# Altium PCB Mini-Rambo-ATX.PcbDoc (part 2 of 3)
Units mil, origin at the board's own origin, x right, y up, seen from the top; angles counter-clockwise.
Board outline 4133.86 x 2795.28 mil, 4 copper layers (Top, GND, Supply, Bottom), stack 61.811 mil thick; 252 components, 203 nets, 844 pads, 559 vias.
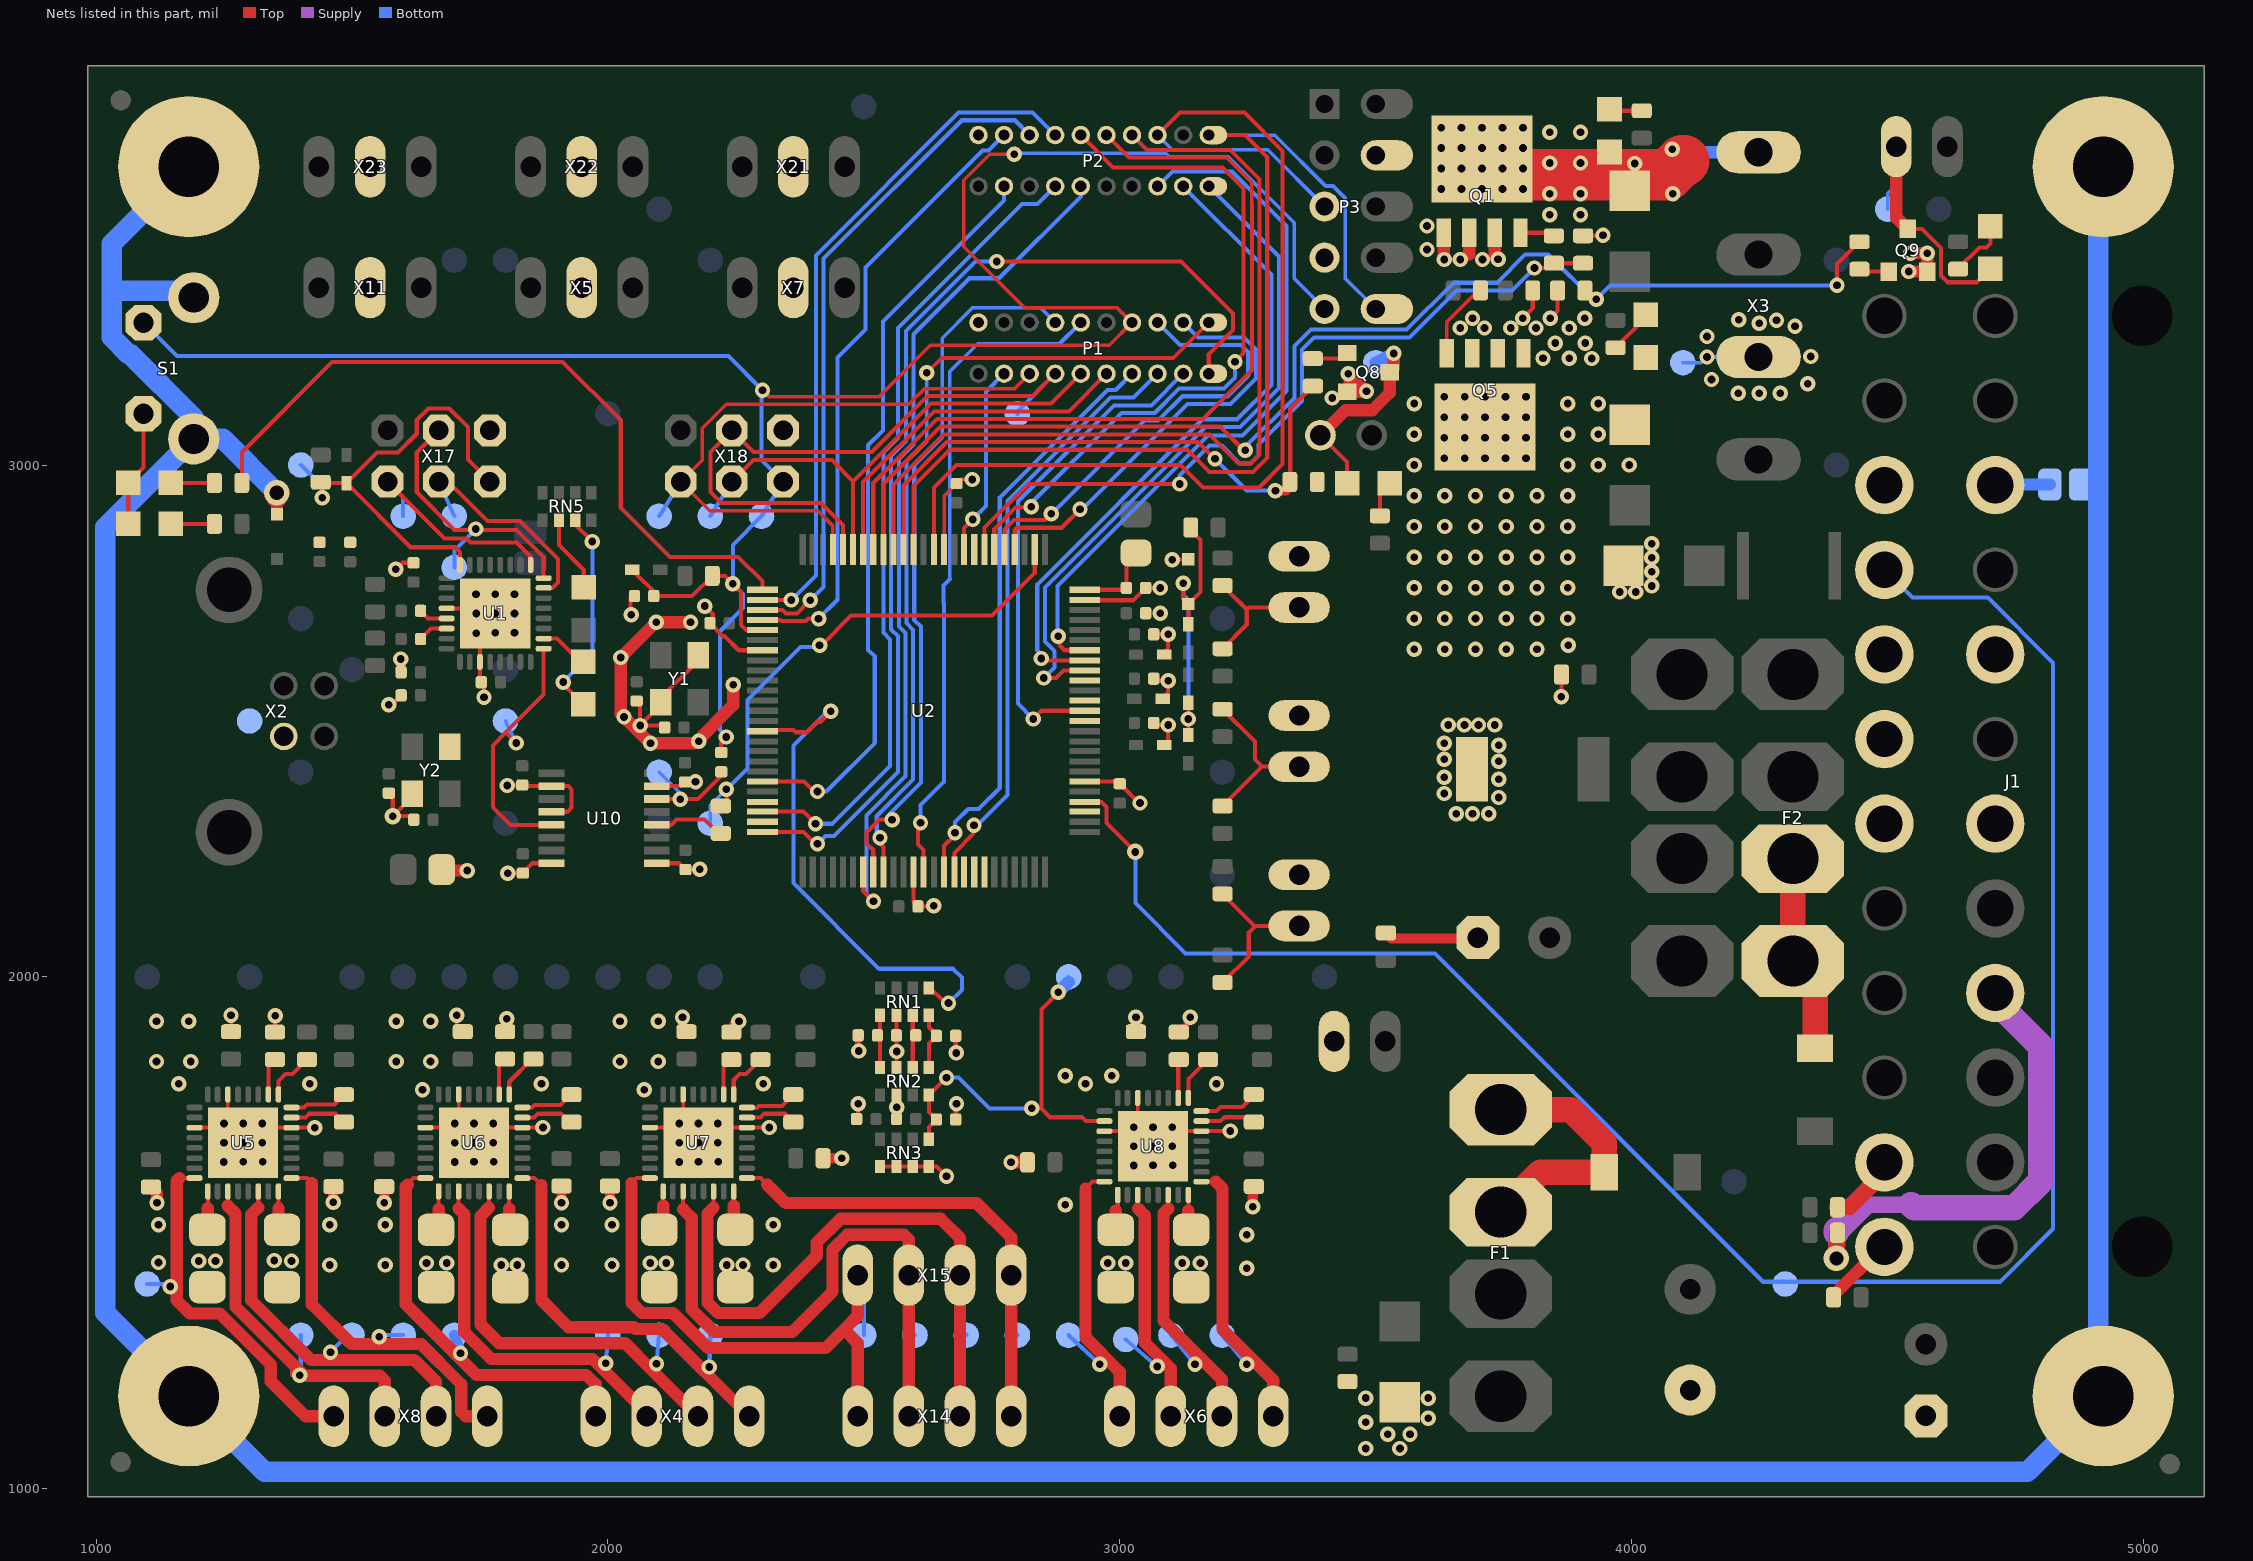
[diagram p4: the nets of this part, all layers, seen from the top]

## Via types
v1: diameter 30, hole 15, Top to Bottom, 422 vias
v2: diameter 30, hole 15, Top to Bottom, tented both sides, 131 vias
v3: diameter 50, hole 28, Top to Bottom, tented both sides, 3 vias
v4: diameter 32, hole 15, Top to Bottom, 1 vias
v5: diameter 30, hole 15, Top to Bottom, tented top, 1 vias
v6: diameter 32, hole 15, Top to Bottom, tented both sides, 1 vias

## Nets (pads, with @x,y where several pads share a name; then routed paths per layer and width w, separated by ;. In a path a pad name is that pad's centre, name@x,y a point inside that pad or via, vN(x,y) a via of type N, cw(c..) or ccw(c..) an arc to the next point about the centre after c; other vN are vias at no path point) (continued)
E1-STEP: P2.P$9 U2.57 | length 1688.2
  Top w8: U2.57@2498.68,2205 2498.68,2167.66 v1(2518.7,2147.64)
  Bottom w8: v1(2518.7,2147.64) 2504.92,2161.42 2504.92,2315.61 2581.33,2392.02 2581.33,2671.84 2568.38,2684.79 2568.38,3011.73 2597,3040.35 2597,3255.47 2706.33,3364.81 2763.78,3364.81 2923.82,3524.84 P2.P$9@2923.82,3544.49 P2.P$9@2921.7,3544.49
E-REF-PWM: RN1.1 U2.40 | length 1038.4
  Top w8: U2.40@2301.83,2480 2304.13,2482.3 2362.81,2482.3 2367.18,2477.93 2388.72,2477.93 2409.22,2498.44 2414.77,2498.44 v1(2435.04,2518.7) ; RN1.1@2626.97,1978.35 2629.65,1978.35 2659.18,1948.82 v1(2665.35,1948.82)
  Bottom w8: v1(2435.04,2518.7) 2429.49,2518.7 2362.41,2451.62 2362.41,2183.41 2530.02,2015.8 2674.51,2015.8 2691.35,1998.96 2691.35,1974.82 v1(2665.35,1948.82)
FAN-0: R21.1 R71.1 U2.17 | length 2438.1
  Top w8: U2.17@2538.05,2834.96 2538.05,2963.38 2649.52,3074.85 3196.15,3074.85 v1@3249,3022 ; v1(4401,3351) 4401,3392.33 R71.1@4444.89,3436.22
  Bottom w8: v1(3245,3029) 3245,3034.98 3341,3130.98 3341,3232.21 3373.26,3264.47 3560.09,3264.47 3651.62,3356 3737,3356 3792,3411 3837,3411 3924,3324 v2(3931,3324) 3958,3351 v1(4401,3351) ; v1@3246,3022 v1@3249,3022
FAN-1: R9.1 R16.1 U2.15 | length 1172.4
  Top w8: U2.15@2577.42,2834.96 2577.42,2960.32 2661.94,3044.85 3153.15,3044.85 v1(3186,3012) ; R16.1@3324,2950 3332.23,2958.23 R16.1@3332.23,2967 3332.98,2967.76 3332.98,3110.22 R9.1@3377,3154.23
  Top w20: v1(3304,2950) R16.1@3324,2950
  Bottom w8: v1(3186,3012) 3248,2950 v1(3304,2950)
FAN-2: P2.P$10 U2.6 | length 1392.2
  Top w8: U2.6@2754.79,2834.96 2754.79,2875.31 2796.34,2916.86 2825.32,2916.86 v1(2826.91,2918.45) ; P2.P$10@2923.82,3644.49 2987.09,3581.22 3200.78,3581.22 3242,3540 3242,3219 v2(3225,3202)
  Bottom w8: v1(2826.91,2918.45) 2820.02,2918.45 3003.19,3101.61 3068.3,3101.61 3116.03,3149.35 3203.83,3149.35 3225,3170.52 v2(3225,3202) v2@3219.59,3196.59
FGND: "Net Tie.1" D16.C pad.0 pad.1 pad.2 pad.3 S1.3 S1.4 | length 9358.2
  Top w24: D16.C@1353.35,2903.54 v3@1353.35,2935.65
  Top w40: v3@1353.35,2935.65 v3(1353.35,2945.61)
  Bottom w40: pad.2@1181.1,3582.68 1030.73,3432.31 1030.73,3338 ; S1.3@1190.73,3326.98 1177.73,3339.98 1032.71,3339.98 1030.73,3338 ; v3(1353.35,2945.61) 1247.98,3050.98 S1.4@1190.73,3050.98 ; pad.1@4921.26,3582.68 4911.58,3573 4911.58,1190.78 pad.0@4921.26,1181.1 4773.16,1033 1329.2,1033 pad.3@1181.1,1181.1 1018,1344.2 1018,2878.24 S1.4@1190.73,3050.98 ; 1030.73,3338 1030.73,3249.29 1064.05,3215.98 1067.42,3215.98 1190.73,3092.66 S1.4@1190.73,3050.98
GND: "Net Tie.2" C1.2 C3.2 C4.2 C5.2 C6.2 C7.2 C8.2 C9.2 C17.2 C18.2 C19.2 C20.2 C21.2 C22.2 C23.2 C24.2 C25.2 C26.2 C29.2 C31.1 C34.2 C36.1 C39.2 C41.1 C44.2 C46.1 C47.2 C48.2 C52.2 C53.2 C54.2 C56.2 C57.2 C58.2 C59.2 C60.2 C62.2 C68.1 C69.2 C71.2 C72.2 C73.2 C74.2 D2.A D5.A D7.A D8.A D12.A D13.A D15.A J1.3 J1.5 J1.7 J1.15 J1.17 J1.18 J1.19 J1.24 LED1.C LED7.C P1.P$2 P2.P$2 P3.4 P3.7 Q1.1 Q1.2 Q1.3 Q5.1 Q5.2 Q5.3 Q8.2 Q9.2 R4.2 R7.2 R8.2 R10.2 R14.2 R15.2 R16.2 R19.2 R20.2 R21.2 R43.2 R57.2 RN1.6 RN2.3 RN2.6 RN3.5 RN3.6 RN3.7 RN3.8 S1.2 U2.11 U2.32 U2.62 U2.81 U2.99 U5.6 U5.14 U5.19 U5.33 U6.6 U6.14 U6.19 U6.33 U7.6 U7.14 U7.19 U7.33 U8.6 U8.14 U8.19 U8.33 U10.9 U10.15 X1.1 X5.2 X7.2 X11.2 X12.1 X18.6 X21.2 X22.2 X23.2 X27.1 X28.1 Y1.2 Y1.4 | length 5508.4
  Top w7: U5.14@1257.4,1770.5 1257.4,1706.01 1257.87,1705.54 v2(1287.4,1676.01) ; C24.2@1263.78,1892.91 v1(1263.78,1925.2) ; v1(1704.72,1925.2) 1704.72,1904.72 C23.2@1716.54,1892.91 ; U6.14@1708.31,1770.5 1708.31,1706.01 1708.78,1705.54 v2(1738.31,1676.01) ; C18.2@2145.67,1900.79 C18.2@2153.54,1892.91 ; U7.14@2146.93,1770.5 2146.93,1706.01 2147.4,1705.54 v2(2176.93,1676.01) ; U2.11@2656.79,2834.96 2656.79,2939.57 C52.2@2681.1,2963.88 2689.66,2972.44 2712.6,2972.44 v1@2711.76,2971.6 ; U8.14@3034.96,1763.61 3034.96,1699.12 3035.43,1698.65 v2(3064.96,1669.12)
  Top w8: LED7.C@1063,2885 LED1.C@1063,2965 1092.73,2994.73 S1.2@1092.73,3099.98 ; U5.19@1192.4,1705.54 U5.33@1257.87,1705.54 ; v2(1287.4,1676.01) 1316.93,1705.54 U5.6@1381.89,1705.54 v1(1427.34,1705.54) ; C31.1@1349.42,1892.1 1349.42,1923.23 v1(1350.39,1924.21) ; U6.19@1643.31,1705.54 U6.33@1708.78,1705.54 ; v2(1738.31,1676.01) 1767.84,1705.54 U6.6@1832.8,1705.54 1872.86,1705.54 v1(1873.03,1705.71) ; C1.2@2044.09,2744.09 2044.09,2708.86 v1(2045.28,2707.68) ; C58.2@2056.1,2539.07 2062.99,2532.18 v1(2062.99,2491.14) ; U7.19@2081.93,1705.54 U7.33@2147.4,1705.54 ; U10.9@2095.13,2222.04 2139.18,2222.04 C68.1@2151.57,2209.65 ; U10.15@2095.13,2372.54 2095.59,2373 2142.98,2373 C69.2@2150.59,2380.61 2170.76,2380.61 v1(2171.16,2381) ; C57.2@2110.92,2487.2 2106.98,2491.14 v1(2062.99,2491.14) ; C68.1@2151.57,2209.65 2180.12,2209.65 v1(2179.43,2210.34) ; Y1.2@2176.56,2627.99 2176.56,2618.49 2103.15,2545.07 2103.15,2531.29 v1(2062.99,2491.14) ; v2(2176.93,1676.01) 2206.46,1705.54 U7.6@2271.42,1705.54 2314.79,1705.54 v1(2314.96,1705.71) ; v1(2188.98,2724.41) 2204.72,2708.66 2204.72,2696.17 C9.2@2199.5,2690.94 2225.09,2665.35 2227.69,2665.35 2228.02,2665.68 2255.59,2638.11 U2.32@2301.83,2638.11 ; C41.1@2241.14,1891.93 2241.14,1910.43 2255.9,1925.19 v1(2255.9,1913.38) ; v1@2488.19,1753.94 2488.87,1753.25 C48.2@2488.87,1722.44 ; RN3.5@2531.72,1629.5 RN3.6@2563.72,1629.5 RN3.7@2595.47,1629.5 RN3.8@2626.97,1629.5 2627.39,1629.92 2641.73,1629.92 v1(2661.42,1610.24) ; RN2.3@2563.72,1822.83 2563.72,1854.08 v1(2563.98,1854.33) 2563.68,1854.63 C21.2@2563.68,1885.83 ; RN1.6@2563.72,1924.77 C21.2@2563.72,1885.87 ; U2.62@2597.1,2205 2597.1,2146.31 C7.2@2605.61,2137.8 2635.83,2137.8 v1(2636.81,2138.78) ; C20.2@2679.43,1721.46 2679.43,1750.3 v1(2681.1,1751.97) ; C19.2@2679.43,1884.84 2679.43,1852.28 v1(2680.25,1851.47) ; U2.81@2931.79,2382 2995.27,2382 C8.2@3000,2377.27 3039.37,2337.9 3039.37,2334.65 v1@3045.39,2340.67 ; U2.99@2931.79,2736.54 2932.48,2735.84 3026.5,2735.84 C26.2@3050.5,2759.84 v1(3078.74,2759.84) ; U8.19@2969.96,1698.65 U8.33@3035.43,1698.65 ; v2(3064.96,1669.12) 3094.49,1698.65 U8.6@3159.45,1698.65 3215.38,1698.65 v1(3215.55,1698.82) ; C4.2@3066.24,2496.06 3070.19,2492.12 v1(3094.48,2492.12) 3094.48,2460.62 D5.A@3086.61,2452.76 ; C56.2@3066.24,2582.68 3070.19,2578.74 v1(3094.48,2578.74) 3094.48,2555.11 D15.A@3082.68,2543.31 ; C59.2@3066.24,2669.29 v1(3094.49,2669.29) 3094.49,2641.73 D13.A@3082.68,2629.92 ; v1(3102.36,2814.96) 3103.06,2815.65 D12.A@3133.86,2815.65 ; v1(3787,3287) 3806.77,3306.77 R57.2@3806.77,3341 ; v1(3841,3287) 3855.23,3301.23 R21.2@3855.23,3341 ; v1(3862.2,2547.24) 3862.99,2548.03 C62.2@3862.99,2590.55 ; R43.2@3905,3447.77 3942.77,3447.77 v1(3944,3449) ; C21.2@2563.68,1885.83 C21.2@2563.72,1885.87
  Top w12: C47.2@2488.87,1885.83 2488.87,1856.6 v1(2490.16,1855.32) ; C46.1@3115.16,1892.1 3137.8,1914.74 v1(3137.8,1921.26)
  Top w20: C71.2@1103.39,1585.63 C71.2@1107.24,1589.49 ; v1(1463.58,1560.04) C29.2@1463.58,1590.35 ; v1(1562.99,1559.06) C72.2@1562.99,1590.35 ; v1(1909.45,1559.06) C34.2@1909.45,1591.34 ; v1(2003.94,1559.06) C73.2@2003.94,1591.34 ; C18.2@2145.67,1900.79 v1(2145.67,1921.26) ; C39.2@2420.47,1645.67 v1(2456.69,1645.67) ; v1(3259.84,1551.18) 3259.84,1588.39 C44.2@3261.81,1590.35 ; C25.2@3519.68,2085.83 3530.71,2074.8 C54.2@3693.78,2074.8
  Top w24: C71.2@1107.24,1589.49 1119.09,1577.64 v1@1119.09,1558.07 ; v1(2062.99,2491.14) 2048.23,2491.14 v1@2039.37,2500 ; v1@2165.35,2692.91 v1(2094.2,2692.91) v1(2025.1,2623.82) 2025.1,2514.27 v1@2039.37,2500 ; v1(2244.65,2570.87) 2244.65,2530.94 2169.92,2456.2 v1(2083.17,2456.2) v1@2039.37,2500 ; v1(2787.4,1637.8) C74.2@2819.68,1637.8 ; C17.2@3031.5,1892.91 v1(3031.5,1921.26) ; Q8.2@3443.98,3143.32 v1@3481,3143.32 ; Q8.2@3449,3142.94 3449,3177 v1(3482,3144) ; v1@3632.68,3410.63 Q1.1@3632.68,3453.74 ; 3682.68,3411.81 Q1.2@3682.68,3453.74 ; v1@3732.68,3409.84 Q1.3@3732.68,3453.74 ; C60.2@4394.49,1374.02 4394.49,1378.18 4488.75,1472.44 J1.24@4493.7,1472.44 ; v1(4541.34,3377.95) Q9.2@4577.37,3377.95 v1(4577.37,3413.98) v1(4544.68,3413.98)
  Bottom w24: J1.3@4710.24,2960.63 4711.61,2962 4817,2962
  other v1: 3480.32,1078.74 3547.24,1078.74 3523.62,1106.3 3566.93,1106.3 3480.32,1129.92 3602.36,1137.8 3480.32,1177.17 3602.36,1177.17 3248,1431 1456.69,1437.01 1564.96,1437.01 1791.34,1437.01 1822.83,1437.01 1909.45,1437.01 2007.87,1437.01 2232.28,1437.01 2263.78,1437.01 2322.83,1437.01 1645.67,1440.94 1685.04,1440.94 2082.68,1440.94 2114.17,1440.94 2976.38,1440.94 3011.81,1440.94 3122.05,1440.94 3157.48,1440.94 1122,1442 1200.79,1444.88 1233.27,1444.88 1381.89,1444.88 1348.43,1445.87 3248.03,1496.06 1122.05,1515.75 1456.69,1515.75 1564.96,1515.75 1909.45,1515.75 2007.87,1515.75 2322.83,1515.75 2893.7,1555.12 1119.09,1559.06 2563.98,1745.08 2489.17,1751.97 1637.8,1779.53 2070.87,1779.53 1161.42,1791.34 1417.32,1791.34 1870.08,1791.34 2303.15,1791.34 2933.07,1791.34 3188.98,1791.34 1802.25,1918.4 3657.48,2318.9 3688.98,2318.9 3720.47,2318.9 3039.37,2339.57 3740.16,2350.39 3633.86,2358.27 3740.16,2385.83 3633.86,2389.76 3740.16,2421.26 3633.86,2425.2 3740.16,2452.76 3633.86,2456.69 2177.17,2460.63 3641.73,2492.13 3673.23,2492.13 3700.79,2492.13 3732.28,2492.13 2031.5,2507.87 2161.42,2692.91 3078.74,2710.63 3976.38,2751.97 4007.87,2751.97 4039.37,2763.78 4039.37,2791.34 4039.37,2818.9 4039.37,2846.46 2711.75,2971.6 3922,3208 3826.77,3208.66 3877.95,3208.66 3850.39,3238.19 3909.45,3238.19 3665.35,3267.72 3712.6,3267.72 3763.78,3267.72 3813,3267.72 3877.95,3267.72 3688.97,3287 3908,3287 3633.86,3401.57 3665.35,3401.57 3708.66,3401.57 3739,3402 3600,3421 3600,3467
  other v2: 3027.2,1631.43 3064.96,1631.91 3103.35,1631.72 1249.64,1638.32 1700.55,1638.32 2139.17,1638.32 1287.4,1638.8 1325.79,1638.61 1738.31,1638.8 1776.69,1638.61 2176.93,1638.8 2215.31,1638.61 3027.56,1669.12 3102.36,1669.12 1250,1676.01 1324.8,1676.01 1700.91,1676.01 1775.71,1676.01 2139.53,1676.01 2214.33,1676.01 3027.56,1706.52 3064.96,1706.52 3102.36,1706.52 1250,1713.41 1287.4,1713.41 1324.8,1713.41 1700.91,1713.41 1738.31,1713.41 1775.71,1713.41 2139.53,1713.41 2176.93,1713.41 2214.33,1713.41 2893.7,1807.09 2984.25,1807.09 1118.11,1834.65 1185.04,1834.65 1586.61,1834.65 1653.54,1834.65 2023.62,1834.65 2098.43,1834.65 1118.11,1913.39 1181.1,1913.39 1586.61,1913.39 1653.54,1913.39 2023.62,1913.39 2098.43,1913.39 3415,3131 3446,3178
GND1: C2.1 C11.2 C12.2 C13.2 C14.2 C15.2 C16.2 C63.2 C67.1 C70.2 R72.1 TP47.TP U1.3 U1.28 U1.33 U10.2 U10.4 U10.8 X2.4 X17.6 Y2.2 Y2.4 | length 887.1
  Top w8: C13.2@1571.85,2358.95 1579.72,2351.08 v4(1579.72,2313.98) ; v1(1571.85,2531.5) 1577.5,2531.5 C11.2@1596,2550 ; v1(1585.63,2796.26) 1598.37,2809 C16.2@1620,2809 ; C15.2@1595.47,2595.53 C15.2@1596,2595 ; C12.2@1613.61,2307.09 C12.2@1620.76,2307.09 1613.87,2313.98 v4(1579.72,2313.98) ; Y2.2@1617.54,2358.12 1617.54,2351.79 v4(1579.72,2313.98) ; C2.1@1675.2,2209.65 C2.1@1677.17,2207.68 ; U1.28@1685,2720 1770,2720 v2(1780,2710) 1750,2680 U1.3@1750,2615.51 1750,2578.44 C14.2@1752.65,2575.79 1757.87,2570.57 v1(1757.87,2546.26) ; v1(1803.15,2374.02) 1803.83,2374.7 C70.2@1832.68,2374.7 ; v1(1804.13,2202.76) C67.1@1833.66,2202.76 1852.94,2222.04 U10.8@1889.76,2222.04 ; C70.2@1833.36,2371.06 1834.84,2372.54 U10.2@1889.76,2372.54 1922.74,2372.54 1929.13,2366.14 1929.13,2330.71 1920.96,2322.54 U10.4@1889.76,2322.54
  Top w20: C15.2@1595.47,2595.53 v1(1595.47,2621.06)
  Top w24: C2.1@1677.17,2207.68 v1(1725.39,2207.68)
  other v2: 1742.6,2671.61 1780,2672.6 1817.4,2672.6 1742.8,2710 1817.4,2710 1780,2747.4 1817.4,2747.4 1742.31,2747.76
HEAT-0: R42.1 R43.1 U2.7 | length 1536.5
  Top w8: U2.7@2735.79,2834.96 2735.79,2877.52 2821.27,2963 v1(3117,2963) ; v1(3810,3385) 3838.77,3385 R42.1@3848,3394.23 R43.1@3905,3394.23
  Bottom w8: v1(3117,2963) 3117,2979.77 3175.23,3038 3199.23,3038 3234.23,3003 3255.77,3003 3271,3018.23 3271,3039.77 3356,3124.77 3356,3226 3379.47,3249.47 3566.31,3249.47 3657.83,3341 3766,3341 v1(3810,3385)
HEAT-1: P2.P$14 U2.16 | length 1736.2
  Top w7: 3215.5,3615.49 3272.98,3558 3272.98,3491
  Top w8: U2.16@2557.73,2834.96 2557.73,2961.85 2655.73,3059.85 3174.92,3059.85 3231.77,3003 3255.77,3003 3272.98,3020.21 3272.98,3491 ; P2.P$14@3023.82,3644.49 3052.82,3615.49 3215.5,3615.49
L13: R33.1 U2.26 | length 1444.6
  Top w8: R33.1@1284.77,2965 1284.77,3024.93 1461.38,3201.54 1911.11,3201.54 2025.13,3087.52 2025.13,2916.44 2121,2820.56 2254.24,2820.56 2301.83,2772.98 U2.26@2301.83,2756.22
MISO2: TP43.TP U1.17 X17.1 | length 436.5
  Top w8: X17.1@1569.53,2967.56 1680.76,2856.32 1723.91,2856.32 1731.23,2849 1821.37,2849 1848.9,2821.47 U1.17@1848.9,2805
  Bottom w8: X17.1@1569.53,2967.56 1600,2937.09 TP43.TP@1600,2900
MOSI2: TP42.TP U1.16 X17.4 | length 572.2
  Top w8: X17.4@1669.53,3067.56 1626.53,3024.56 1626.53,2947.09 1700.29,2873.32 1821.09,2873.32 1874.49,2819.92 U1.16@1874.49,2779
  Bottom w8: TP42.TP@1700,2800 1700,2833 v2(1742,2875)
NetC10_1: C10.1 TP29.TP U10.14 | length 230.2
  Top w8: U10.14@2095.13,2347.54 2175.88,2347.54 2225.39,2397.05 C10.1@2225.39,2406.5
  Bottom w7: TP29.TP@2100,2400 2141,2359 v2(2141,2347)
NetC19_1: C19.1 RN1.8 RN2.1 | length 115
  Top w8: RN2.1@2626.97,1822.83 2626.97,1870.08 2642.72,1885.83 2626.97,1901.58 RN1.8@2626.97,1924.77
NetC20_1: C20.1 RN2.8 RN3.1 TP12.TP U8.18 | length 770.3
  Top w8: RN3.1@2626.97,1683.07 2626.97,1706.69 C20.1@2641.73,1721.46 2626.97,1736.22 RN2.8@2626.97,1769.26 2627.53,1769.26 v1(2661.42,1803.15) ; 2845.83,1744 2864.02,1725.82 2926.54,1725.82 2934.03,1718.33 U8.18@2969.96,1718.33 ; 2846.72,1743.11 2846.72,1936.72 v2(2880,1970)
  Top w10: v1(2827.76,1743.11) 2828.65,1744 2845.83,1744
  Bottom w8: v1(2661.42,1803.15) 2685.04,1803.15 2745.08,1743.11 v1(2827.76,1743.11) ; TP12.TP@2900,1990 TP12.TP@2900,2000
  Bottom w24: v2(2880,1970) TP12.TP@2900,1990
NetC21_1: C21.1 RN1.7 RN2.2 | length 106.8
  Top w8: RN2.2@2595.47,1822.83 2595.47,1879.92 C21.1@2601.38,1885.83 2595.47,1891.73 RN1.7@2595.47,1924.77
NetC26_1: C26.1 L2.2 U2.100 | length 166.7
  Top w8: U2.100@2931.79,2756.22 3009.17,2756.22 C26.1@3012.8,2759.84 3012.8,2838.97 L2.2@3009.24,2842.52
NetC27_2: C27.2 U5.9 | length 99
  Top w8: U5.9@1356.3,1770.5 1356.3,1796.26 1370.08,1810.04 1383.54,1810.04 C27.2@1412.06,1838.55
NetC28_1: C28.1 U5.7 | length 112.1
  Top w8: U5.7@1381.89,1725.22 1408.84,1725.22 1416.15,1732.54 1468.05,1732.54 C28.1@1484.25,1716.34
NetC28_2: C28.2 U5.8 | length 112.7
  Top w8: U5.8@1381.89,1744.91 1406.32,1744.91 1412.4,1750.98 1465.35,1750.98 C28.2@1484.25,1769.88
NetC31_2: C31.2 U5.10 | length 73.4
  Top w8: U5.10@1336.61,1770.5 1336.61,1825.75 C31.2@1349.42,1838.55
NetC32_2: C32.2 U6.9 | length 94
  Top w8: U6.9@1807.21,1770.5 1807.21,1795.16 1851.42,1839.37 C32.2@1858.27,1839.37
NetC33_1: C33.1 U6.7 | length 106.2
  Top w8: U6.7@1832.8,1725.22 1855.77,1725.22 1863.26,1732.71 1908.29,1732.71 1924.66,1716.34 C33.1@1929.13,1716.34
NetC33_2: C33.2 U6.8 | length 106.7
  Top w8: U6.8@1832.8,1744.91 1851.21,1744.91 1856.3,1750 1907,1750 1926.88,1769.88 C33.2@1929.13,1769.88
NetC36_2: C36.2 U6.10 | length 70.7
  Top w8: U6.10@1787.52,1770.5 C36.2@1787.52,1832.1 ; C36.2@1795.39,1832.1 C36.2@1801.85,1838.55
NetC37_2: C37.2 U7.9 | length 97.2
  Top w8: U7.9@2245.83,1770.5 2245.83,1798.98 2256.89,1810.04 2269.88,1810.04 C37.2@2298.23,1838.39
NetC38_1: C38.1 U7.7 | length 100.7
  Top w8: U7.7@2271.42,1725.22 2297.7,1725.22 2305.19,1732.71 2345.83,1732.71 C38.1@2362.2,1716.34
NetC38_2: C38.2 U7.8 | length 101.8
  Top w8: U7.8@2271.42,1744.91 2272.23,1744.09 2290.77,1744.09 2294.71,1748.03 2340.35,1748.03 C38.2@2362.2,1769.88
NetC41_2: C41.2 U7.10 | length 74.1
  Top w8: U7.10@2226.14,1770.5 2226.14,1823.39 C41.2@2241.14,1838.39
NetC42_2: C42.2 U8.9 | length 90.8
  Top w8: U8.9@3133.86,1763.61 3133.86,1800.17 C42.2@3172.24,1838.55
NetC43_1: C43.1 U8.7 | length 109.4
  Top w8: U8.7@3159.45,1718.33 3196.88,1718.33 3204.37,1725.82 3252.33,1725.82 C43.1@3261.81,1716.34
NetC43_2: C43.2 U8.8 | length 116.3
  Top w8: U8.8@3159.45,1738.02 3188.8,1738.02 3196.85,1746.06 3239.17,1746.06 3261.81,1768.7 C43.2@3261.81,1769.88
NetC46_2: C46.2 U8.10 | length 75.4
  Top w8: U8.10@3114.17,1763.61 3114.17,1837.57 C46.2@3115.16,1838.55
NetC47_1: C47.1 RN1.5 RN2.4 | length 106.2
  Top w8: RN2.4@2531.72,1822.83 2531.72,1880.68 C47.1@2526.57,1885.83 2531.72,1890.98 RN1.5@2531.72,1924.77
NetD6_A: D6.A LED2.C Q1.MB TP17.TP X3.4 | length 553.8
  Top w50: X3.4@4246.26,3594.49 X3.4@4248.03,3596.26
  Top w100: Q1.MB@3716.45,3567.01 4070.95,3567.01 4098.43,3594.49 4102.36,3594.49
  Bottom w8: X3.4@4248.03,3611.02 X3.4@4249.01,3612
  Bottom w24: TP17.TP@4100,3600 4111.02,3611.02 X3.4@4248.03,3611.02
  other v1: 3840,3489 3900,3489 3840,3530 3900,3530 4080,3530 3627.68,3539.13 3667.68,3539.13 3707.68,3539.13 3747.68,3539.13 3787.68,3539.13 3627.68,3579.13 3667.68,3579.13 3707.68,3579.13 3747.68,3579.13 3787.68,3579.13 3840,3590 3900,3590 3627.68,3619.13 3667.68,3619.13 3707.68,3619.13 3747.68,3619.13 3787.68,3619.13 3840,3650 3900,3650 3627.68,3659.13 3667.68,3659.13 3707.68,3659.13 3747.68,3659.13 3787.68,3659.13
  other v2: 4006,3589 4079,3617
NetD10_A: D10.A LED6.C Q5.MB TP18.TP X3.2 | length 152.6
  Bottom w7: TP18.TP@4100,3200 4136,3200 v2(4147.02,3211.02) X3.2@4248.03,3211.02
  other v1: 3575,2640 3635,2640 3695,2640 3755,2640 3815,2640 3876,2648 3575,2700 3635,2700 3695,2700 3755,2700 3815,2700 3875,2700 3575,2760 3635,2760 3695,2760 3755,2760 3815,2760 3875,2760 3575,2820 3635,2820 3695,2820 3755,2820 3815,2820 3875,2820 3575,2880 3635,2880 3695,2880 3755,2880 3815,2880 3875,2880 3575,2940 3635,2940 3695,2940 3755,2940 3815,2940 3875,2940 3575,3000 3875,3000 3935,3000 3995,3000 3633.58,3013.11 3673.58,3013.11 3713.58,3013.11 3753.58,3013.11 3793.58,3013.11 3633.58,3053.11 3673.58,3053.11 3713.58,3053.11 3753.58,3053.11 3793.58,3053.11 3575,3060 3875,3060 3935,3060 3633.58,3093.11 3673.58,3093.11 3713.58,3093.11 3753.58,3093.11 3793.58,3093.11 3575,3120 3875,3120 3935,3120 3633.58,3133.11 3673.58,3133.11 3713.58,3133.11 3753.58,3133.11 3793.58,3133.11
  other v2: 4208,3140 4249,3140 4290,3140 4344,3159 4156,3167 4350,3212 4147,3251 4319,3271 4249,3277 4283,3283 4209,3284
NetF1_1: F1.1 FB1.2 | length 521.2
  Top w50: F1.1@3744.09,1540.63 3821.57,1618.11 FB1.2@3946.46,1618.11 3946.46,1675.59 3881.42,1740.63 F1.1@3744.09,1740.63
NetF2_1: F2.1 FB2.2 | length 388.3
  Top w50: F2.1@4314.96,2231.02 F2.1@4314.96,2031.02 4358.27,1987.72 FB2.2@4358.27,1860.63
NetJ1_9: J1.9 R74.2 | length 954.4
  Top w32: v3(4400,1450) 4400,1475 4401.77,1476.77 R74.2@4401.77,1500
  Supply w32: v3(4400,1450) 4400,1500 ; 4450.39,1555.12 4544.88,1555.12
  Supply w50: 4400,1500 4400,1504.73 4450.39,1555.12 ; 4544.88,1555.12 4545.74,1555.12 4552.15,1548.71 4747.14,1548.71 4799.32,1600.89 4799.32,1864.37 4710.24,1953.46 J1.9@4710.24,1968.5
NetJ1_23: J1.23 R75.1 | length 139.5
  Top w32: R75.1@4401.77,1550 4425,1550 4493.7,1618.7 J1.23@4493.7,1637.8
NetLED1_A: LED1.A R33.2 | length 84.9
  Top w8: LED1.A@1146.34,2965 R33.2@1231.23,2965
NetLED2_A: LED2.A R40.1 | length 64.1
  Top w8: LED2.A@3956.69,3694.88 3959.45,3692.12 R40.1@4019.69,3692.12
NetLED3_A: LED3.A R70.1 | length 118
  Top w8: R70.1@4637.79,3382.68 4637.79,3383.76 4679.23,3425.2 4692.91,3425.2 4700.79,3433.07 LED3.A@4700.79,3466.53
NetLED3_C: LED3.C Q9.3 TP23.TP X9.1 | length 546.2
  Top w8: Q9.3@4539.37,3461.32 4566.8,3461.32 4604.37,3423.75 4604.37,3369.71 4616.96,3357.11 4674.7,3357.11 LED3.C@4700.79,3383.2
  Top w25: X9.1@4516.93,3622.05 4516.93,3483.76 Q9.3@4539.37,3461.32
  Bottom w7: TP23.TP@4500,3500 4500,3531 4517,3548 4517,3621.98 X9.1@4516.93,3622.05
NetLED4_A: LED4.A RN5.6 | length 151.5
  Top w8: RN5.6@1904.28,2892.29 1904.28,2843.76 1952.76,2795.28 LED4.A@1952.76,2760.83
NetLED6_A: LED6.A R58.1 | length 88.6
  Top w8: R58.1@3968.5,3229.14 4027.56,3288.2 LED6.A@4027.56,3293.31
NetLED7_A: LED7.A R35.2 | length 84.9
  Top w8: LED7.A@1146.34,2885 R35.2@1231.23,2885
NetLED8_A: LED8.A R69.1 | length 71.2
  Top w8: R69.1@3508,2900.77 3508,2944.67 LED8.A@3527.34,2964
NetLED8_C: LED8.C Q8.3 TP22.TP X35.2 | length 404.6
  Top w8: X35.2@3392,3058 3444,3006 LED8.C@3444,2964
  Top w24: X35.2@3392,3058 3441,3107 3493.08,3107 3527.35,3141.27 Q8.3@3527.35,3181.32 3535,3188.97 v2(3535,3218)
  Bottom w24: TP22.TP@3500,3200 v2(3535,3218)
NetLED10_A: LED10.A RN5.7 | length 415.3
  Top w8: v1(1912.49,2575.91) 1910.43,2573.82 LED10.A@1951.77,2532.48 ; RN5.7@1936.02,2892.29 1936.02,2883.82 v1@1969.45,2850.39
  Bottom w8: v1(1912.49,2575.91) 1969.49,2632.91 v1(1969.49,2850.39)
NetQ1_4: Q1.4 R42.2 | length 70.7
  Top w8: Q1.4@3783.66,3452.75 Q1.4@3782.68,3453.74 3835.03,3453.74 R42.2@3847,3441.77
NetQ5_4: Q5.4 R56.2 | length 148.6
  Top w7: Q5.4@3638.58,3218.5 3638.58,3279.43 3700.15,3341 R56.2@3700.77,3341
NetQ8_1: Q8.1 R9.2 | length 69.3
  Top w8: R9.2@3377,3207.77 3438.31,3207.77 Q8.1@3443.98,3213.45
NetQ9_1: Q9.1 R71.2 | length 59
  Top w8: R71.2@4444.89,3382.67 4449.61,3377.95 Q9.1@4501.97,3377.95
NetR4_1: R4.1 U5.32 | length 78.1
  Top w8: 1356.3,1548.23 U5.32@1356.3,1581.01
  Top w24: 1356.3,1548.23 1356.3,1512.68 R4.1@1363.19,1505.79
NetR5_1: R5.1 R6.2 X12.2 | length 314.7
  Top w8: R6.2@3200.78,1988.97 3251.97,2040.16 3251.97,2086.61 3264.96,2099.61 ; R5.1@3200.78,2162.21 3263.39,2099.61 3264.96,2099.61 ; X12.2@3352.36,2099.61 3264.96,2099.61
NetR7_1: R7.1 U5.25 | length 76.6
  Top w8: 1218.4,1548.13 U5.25@1218.4,1581.01
  Top w24: R7.1@1217.52,1504.8 1218.4,1505.68 1218.4,1548.13
NetR8_1: R8.1 U6.32 | length 76.1
  Top w8: 1807.09,1547.24 1807.09,1580.89 U6.32@1807.21,1581.01
  Top w24: 1807.09,1547.24 1807.09,1507.76 R8.1@1809.06,1505.79
NetR10_1: R10.1 U6.25 | length 73.3
  Top w8: 1669.29,1546.26 U6.25@1669.31,1577.07
  Top w24: R10.1@1664.37,1505.79 1669.31,1510.72 1669.29,1546.26
NetR14_1: R14.1 U7.32 | length 76.5
  Top w8: 2245.83,1552.91 U7.32@2245.83,1581.01
  Top w24: 2245.83,1552.91 2245.83,1508.98 R14.1@2249.02,1505.79
NetR15_1: R15.1 U7.25 | length 78.3
  Top w8: 2107.93,1552.81 U7.25@2107.93,1581.01
  Top w24: R15.1@2100.39,1505.79 2107.93,1513.32 2107.93,1552.81
NetR19_1: R19.1 U8.32 | length 70.8
  Top w8: 3133.86,1543.31 U8.32@3133.86,1574.12
  Top w24: 3133.86,1543.31 3133.86,1511.69 R19.1@3139.76,1505.79
NetR20_1: R20.1 U8.25 | length 69.9
  Top w8: 2992.13,1543.51 2995.96,1547.35 U8.25@2995.96,1574.12
  Top w24: R20.1@2992.13,1505.79 2992.13,1543.51
NetR31_1: R31.1 R32.2 X27.2 | length 266.9
  Top w8: R32.2@3200.78,2640.95 3248.03,2688.2 3248.03,2717.32 ; R31.1@3200.78,2764.57 3248.03,2717.32 ; X27.2@3350.39,2721.65 3252.36,2721.65 3248.03,2717.32
NetR34_1: R34.1 U10.12 | length 152
  Top w8: U10.12@2095.13,2297.04 2123.81,2297.04 2134.12,2307.35 2188.65,2307.35 2216.67,2279.33 R34.1@2231.3,2279.33
NetR36_1: R36.1 R37.2 X28.2 | length 328.8
  Top w8: R36.1@3200.79,2333.86 3277.57,2410.63 ; R37.2@3200.78,2522.84 3263.78,2459.84 3263.78,2424.42 3277.57,2410.63 ; X28.2@3348.03,2412.99 X28.2@3350.39,2410.63 3277.57,2410.63
NetTP50_TP: TP50.TP U5.30 X8.2 | length 758.2
  Top w8: 1316.93,1549.21 U5.30@1316.93,1581.01
  Top w24: 1316.93,1549.21 1303.26,1535.55 1303.26,1368.36 1419.9,1251.73 1622.28,1251.73 1664.17,1209.84 X8.2@1664.17,1141.73
  Bottom w8: v2(1458,1267) TP50.TP@1490,1299
NetTP51_TP: TP51.TP U6.30 X4.2 | length 837.6
  Top w8: 1767.84,1549.33 U6.30@1767.84,1581.01
  Top w24: 1767.84,1549.33 1750.98,1532.48 1750.98,1320.87 1787.41,1284.44 2033.28,1284.44 2084.36,1233.36 ; v2(2095,1244) 2084.36,1233.36 ; X4.2@2175.98,1141.73 2084.36,1233.36
  Bottom w8: v2(2095,1244) TP51.TP@2100,1300
NetTP52_TP: TP52.TP U6.1 X4.1 | length 829.7
  Top w8: U6.1@1832.8,1607.01 1856.57,1607.01 1870.08,1593.5
  Top w24: 1870.08,1593.5 1870.08,1368.59 1923.23,1315.44 2050.27,1315.44 2053.41,1312.3 2105.41,1312.3 X4.1@2275.98,1141.73
  Bottom w8: v2(2198,1238) TP52.TP@2200,1300
NetTP53_TP: TP53.TP U5.1 X8.1 | length 810.3
  Top w8: U5.1@1381.89,1607.01 1411.69,1607.01 1421.26,1597.44 ; 1547,1282.73 1553,1288.73 v2(1553,1297)
  Top w24: 1421.26,1597.44 1421.26,1360.49 1499.02,1282.73 1547,1282.73 1635.12,1282.73 1713.58,1204.27 1713.58,1150.59 1722.44,1141.73 X8.1@1764.17,1141.73
  Bottom w8: v2(1553,1297) 1556,1300 TP53.TP@1600,1300
NetTP54_TP: TP54.TP U5.27 X8.3 | length 781.6
  Top w8: 1257.4,1552.64 U5.27@1257.4,1581.01 ; 1391.39,1236.39 1383,1228 1383,1222 v2(1398,1222)
  Top w24: 1257.4,1552.64 1272.26,1537.78 1272.26,1355.52 1391.39,1236.39 ; v2@1394.39,1233.39 1407.06,1220.73 1554.86,1220.73 1564.17,1211.42 X8.3@1564.17,1141.73
  Bottom w8: v2(1398,1222) 1383,1222 1400,1239 TP54.TP@1400,1300
NetTP55_TP: TP55.TP U6.27 X4.3 | length 761.9
  Top w8: 1708.31,1547.6 U6.27@1708.31,1581.01
  Top w24: 1708.31,1547.6 1719.49,1536.42 1719.49,1306.1 1772.15,1253.44 1970.52,1253.44 2075.98,1147.97 X4.3@2075.98,1141.73
  Bottom w8: v2@1996,1246 TP55.TP@2000,1300
  other v2: 1996,1245
NetTP56_TP: TP56.TP U5.24 X8.4 | length 745.6
  Top w8: v2(1145,1395) 1150,1395 v2@1152,1393 ; 1163.11,1607.01 U5.24@1192.4,1607.01
  Top w24: 1163.11,1607.01 1157.48,1601.38 1157.48,1368.21 1183.38,1342.32 1241.63,1342.32 1341.54,1242.41 1341.54,1209.65 1409.45,1141.73 X8.4@1464.17,1141.73
  Bottom w8: TP56.TP@1100,1400 1141,1400 1145,1396 v2(1145,1395)
NetTP57_TP: TP57.TP U6.24 X4.4 | length 821.6
  Top w8: 1609.25,1594.49 1614.17,1589.57 1614.17,1601.38 1619.8,1607.01 U6.24@1643.31,1607.01
  Top w24: 1609.25,1594.49 1605.32,1590.55 1605.32,1360.24 1743.11,1222.44 1957.68,1222.44 1975.98,1204.13 X4.4@1975.98,1141.73
  Bottom w8: v2@1713,1266 1714,1266 v2@1713.86,1266.35
  Bottom w20: TP57.TP@1700,1300 v2@1713.86,1266.35
  other v2: 1712,1265
NetTP58_TP: TP58.TP U7.30 X14.2 X15.2 | length 1301.2
  Top w8: 2206.46,1548.98 U7.30@2206.46,1581.01
  Top w24: 2206.46,1548.98 2194.52,1537.04 2194.52,1363.66 2214.87,1343.3 2296.06,1343.3 2407.8,1455.04 2407.8,1480.46 2454.66,1527.32 2650.35,1527.32 2687.8,1489.88 X15.2@2687.8,1417.32 X14.2@2687.8,1141.73
  Bottom w8: X15.2@2687.8,1417.32 2687.8,1312.2 TP58.TP@2700,1300
NetTP59_TP: TP59.TP U8.30 X6.2 | length 557.4
  Top w8: 3094.49,1547.24 U8.30@3094.49,1574.12
  Top w24: 3094.49,1547.24 3085.26,1538.02 3085.26,1328.12 3199.61,1213.78 X6.2@3199.61,1141.73
  Bottom w8: TP59.TP@3100,1300 v2(3147,1243)
NetTP60_TP: TP60.TP U7.1 X14.1 X15.1 | length 1035.9
  Top w8: U7.1@2271.42,1607.01 2298.5,1607.01 2311.02,1594.49
  Top w24: 2311.02,1594.49 2347.19,1558.32 2720.22,1558.32 2787.8,1490.75 X15.1@2787.8,1417.32 X14.1@2787.8,1141.73
  Bottom w8: X15.1@2787.8,1417.32 2787.8,1312.2 TP60.TP@2800,1300
NetTP61_TP: TP61.TP U8.1 X6.1 | length 607.3
  Top w8: U8.1@3159.45,1600.12 3187.28,1600.12
  Top w24: 3187.28,1600.12 3200.79,1586.61 3200.79,1311.02 3299.61,1212.2 X6.1@3299.61,1141.73
  Bottom w8: TP61.TP@3200,1300 v2(3248,1243)
NetTP62_TP: TP62.TP U8.27 X6.3 | length 540.1
  Top w8: U8.27@3034.96,1574.12 3034.96,1547.72 3035.43,1547.24
  Top w24: 3035.43,1547.24 3048.61,1534.07 3048.61,1286.04 3099.61,1235.04 X6.3@3099.61,1141.73
  Bottom w8: TP62.TP@3011.63,1291.71 v2(3073,1239)
NetTP63_TP: TP63.TP U7.27 X14.3 X15.3 | length 1278.7
  Top w8: 2146.93,1545.98 U7.27@2146.93,1581.01
  Top w24: 2146.93,1545.98 2163.52,1529.4 2163.52,1350.82 2208.23,1306.1 2360.06,1306.1 2438.8,1384.84 2438.8,1467.62 2467.5,1496.32 2578.48,1496.32 2587.8,1487.01 X15.3@2587.8,1417.32 X14.3@2587.8,1141.73
  Bottom w8: X15.3@2587.8,1417.32 2587.8,1312.2 TP63.TP@2600,1300
NetTP64_TP: TP64.TP U8.24 X6.4 | length 598.7
  Top w8: 2933.07,1586.61 2946.57,1600.12 U8.24@2969.96,1600.12
  Top w24: 2933.07,1586.61 2933.07,1295.28 3000,1228.35 3000,1142.13 X6.4@2999.61,1141.73
  Bottom w8: TP64.TP@2900,1300 v2(2961,1243)
NetTP65_TP: TP65.TP U7.24 X14.4 X15.4 | length 1160.5
  Top w8: 2046.26,1597.44 2055.83,1607.01 U7.24@2081.93,1607.01
  Top w24: 2046.26,1597.44 2045.89,1597.07 2045.89,1363.66 2066.25,1343.3 2127.19,1343.3 2195.39,1275.1 2425.69,1275.1 2461.61,1311.02 ; X14.4@2487.8,1141.73 2487.8,1284.84 2461.61,1311.02 ; X15.4@2487.8,1417.32 2487.8,1337.2 2461.61,1311.02
  Bottom w8: X15.4@2487.8,1417.32 2500,1405.12 TP65.TP@2500,1300
OVREF: D1.C D11.C D12.C D14.C R73.1 | length 583.2
  Top w8: v1(3124.02,2768.7) 3124.02,2738.19 D12.C@3133.86,2728.35 ; D1.C@3133.86,2472.44 v1(3133.86,2503.94) D14.C@3133.86,2535.43 ; D11.C@3133.86,2688.98 D12.C@3133.86,2728.35 ; R73.1@3138.59,2877.96 3138.59,2872.41 3157.86,2853.14 3157.86,2752.35 D12.C@3133.86,2728.35
  Bottom w8: v1(3124.02,2768.7) 3124.02,2746.06 3133.86,2736.22 v1(3133.86,2503.94)
PA0: U2.78
PB0_SD-SS: P1.P$11 U2.19 | length 694.4
  Top w8: U2.19@2498.68,2834.96 2498.68,2966.43 2637.09,3104.85 2900.32,3104.85 P1.P$11@2973.82,3178.35
PB1_SCK: P1.P$9 TP35.TP U2.20 X18.3 | length 1016.1
  Top w8: X18.3@2242.13,2967.56 2284.13,3009.56 2437.39,3009.56 2478.99,2967.96 ; U2.20@2478.99,2834.96 2478.99,2967.96 ; P1.P$9@2923.82,3178.35 2865.32,3119.85 2630.88,3119.85 2478.99,2967.96
  Bottom w8: TP35.TP@2200,2900 X18.3@2242.13,2967.56
PB2_MOSI: P1.P$7 TP36.TP U2.21 X18.4 | length 1292.4
  Top w8: U2.21@2459.31,2834.96 2459.31,2882.43 2416.18,2925.56 2222.07,2925.56 2200.13,2947.5 2200.13,3025.56 X18.4@2242.13,3067.56 2284.13,3025.56 2515.38,3025.56 2624.66,3134.85 2830.32,3134.85 P1.P$7@2873.82,3178.35
  Bottom w8: TP36.TP@2800,3100 2800,3104.53 P1.P$7@2873.82,3178.35
PB3_MISO: P1.P$5 TP34.TP U2.22 X18.1 | length 1264.3
  Top w7: U2.22@2439.62,2834.96 2439.62,2880.91 2409.97,2910.56 2199.13,2910.56 X18.1@2142.13,2967.56 2184.13,3009.56 2184.13,3071.62 2231.11,3118.6 2587.91,3118.6 2618.66,3149.35 2794.82,3149.35 P1.P$5@2823.82,3178.35
  Bottom w8: TP34.TP@2100,2900 X18.1@2142.13,2967.56
PC5: P1.P$8 U2.58 | length 1381
  Top w8: U2.58@2518.36,2205 2518.36,2247.65 2506.16,2259.84 2505.49,2260.52 2505.49,2282.42 2530.15,2307.08 v1(2555.11,2307.08)
  Bottom w7: 2653,3053.93 2653,3247.83 2712.01,3306.85 2845.32,3306.85 P1.P$8@2873.82,3278.35
  Bottom w8: v1@2551.18,2319.44 2611.33,2379.59 2611.33,2684.27 2598.38,2697.22 2598.38,2999.31 2653,3053.93
PC6: P1.P$20 U2.59 | length 1626.6
  Top w7: v2(2623,3180) 2652,3209 3104.47,3209 P1.P$20@3173.82,3278.35
  Top w8: v1@2532.16,2259.84 2538.05,2253.96 U2.59@2538.05,2205
  Bottom w7: 2583.38,2976 2583.38,3006.23 2623,3045.85 v2(2623,3180) ; v2@2628,3180 2630,3180 v2@2631,3181
  Bottom w8: v1@2532.16,2259.84 2525.18,2266.83 2525.18,2314.65 2596.33,2385.8 2596.33,2678.06 2583.38,2691.01 2583.38,2976
  other v1: 2531.49,2271.65
PD4: U2.47
PD5: P2.P$7 U2.48 | length 1600.5
  Top w8: U2.48@2301.83,2323 2381.72,2323 v1(2405.51,2299.21)
  Bottom w8: v1(2405.51,2299.21) 2438.34,2299.21 2551.33,2412.2 2551.33,2659.42 2538.38,2672.37 2538.38,3024.16 2567,3052.78 2567,3267.9 2809,3509.9 2839.23,3509.9 P2.P$7@2873.82,3544.49
PD6: U2.49
PD7: P1.P$19 U2.50 | length 2087.8
  Top w8: U2.50@2301.83,2283 2382.35,2283 2405.52,2259.84 v1(2409.44,2259.84) ; v1(2759.84,3397.64) 3119.36,3397.64 3221,3296 3221,3263.68 3173.82,3216.49 P1.P$19@3173.82,3178.35
  Bottom w8: v1(2409.44,2259.84) 2425.2,2275.59 2441.93,2275.59 2566.33,2399.99 2566.33,2665.63 2553.38,2678.58 2553.38,3017.95 2582,3046.57 2582,3261.69 2717.95,3397.64 v1(2759.84,3397.64) ; P1.P$19@3171.7,3178.35 P1.P$19@3173.82,3178.35
PE2: P1.P$18 U2.4 | length 852.6
  Top w8: U2.4@2794.79,2834.96 2794.79,2872.88 2799.36,2877.45 2886.31,2877.45 v1(2922.24,2913.39)
  Bottom w8: v1(2922.24,2913.39) 2926.39,2913.39 3132.35,3119.35 3216.26,3119.35 3266,3169.09 3266,3226 3242.65,3249.35 3152.82,3249.35 P1.P$18@3123.82,3278.35
PE3: P1.P$16 U2.5 | length 886
  Top w8: U2.5@2774.79,2834.96 2774.79,2874.09 2793.14,2892.45 2854.06,2892.45 v1(2866.14,2904.53)
  Bottom w8: v1(2866.14,2904.53) 3048.23,3086.61 3074.51,3086.61 3122.25,3134.35 3210.04,3134.35 3251,3175.3 3251,3219.79 3236.44,3234.35 3117.82,3234.35 P1.P$16@3073.82,3278.35
PE6: U2.8
PE7: P1.P$3 U2.9 | length 375.7
  Top w8: U2.9@2695.79,2834.96 2695.79,2876.89 v1(2712.6,2893.7)
  Bottom w8: v1(2712.6,2893.7) 2738.6,2919.7 2738.6,3143.13 P1.P$3@2773.82,3178.35
PF3: P2.P$15 U2.94 | length 1413.5
  Top w8: v1(2879.79,2665.66) 2881.89,2663.56 2881.89,2647.91 2891.69,2638.11 U2.94@2931.79,2638.11
  Bottom w8: v1@2877.95,2665.66 2877.95,2763.31 3172.52,3057.88 3239.64,3057.88 3326,3144.24 3326,3467 3219.51,3573.49 3102.82,3573.49 P2.P$15@3073.82,3544.49 ; v1@2879.79,2659.32 v1(2879.79,2665.66)
PF4: P2.P$17 U2.93 | length 1323.6
  Top w8: v1(2846.45,2622.04) 2850.07,2618.43 U2.93@2931.79,2618.43
  Bottom w8: v1(2846.45,2622.04) 2854.32,2622.04 2838.79,2637.58 2838.79,2766.57 3161.56,3089.35 3228.68,3089.35 3296,3156.66 3296,3372.31 P2.P$17@3123.82,3544.49
PF5: P2.P$19 U2.92 | length 1349.1
  Top w8: v1(2851.52,2583.79) 2875.13,2583.79 2890.08,2598.74 U2.92@2931.79,2598.74
  Bottom w8: v1(2851.52,2583.79) 2872.45,2604.72 2872.45,2636.23 2853.79,2654.89 2853.79,2760.36 3167.77,3074.35 3234.9,3074.35 3311,3150.45 3311,3407.31 P2.P$19@3173.82,3544.49
PF6: U2.91
PG3: P2.P$6 U2.28 | length 1311.5
  Top w8: U2.28@2301.83,2716.85 2340.86,2716.85 2347.49,2710.22 2369.03,2710.22 2394.81,2735.99 v1(2395.26,2735.99)
  Bottom w8: v1(2395.26,2735.99) 2421.2,2761.93 2421.2,3403.39 2691.3,3673.49 2794.82,3673.49 P2.P$6@2823.82,3644.49
PG4: P2.P$4 U2.29 | length 1214.2
  Top w8: U2.29@2301.83,2697.17 2336.63,2697.17 2338.58,2695.22 2386.67,2695.22 2391.39,2699.93 v1(2411.53,2699.93)
  Bottom w8: v1(2411.53,2699.93) 2448.38,2736.78 2448.38,3209.9 2503.2,3264.72 2503.2,3386.1 2731.62,3614.52 2743.85,3614.52 P2.P$4@2773.82,3644.49
PH2: P2.P$20 P3.10 U2.14 | length 2151.8
  Top w8: U2.14@2597.1,2834.96 2597.1,2958.79 2668.16,3029.85 3130.98,3029.85 3174.82,2986 3259.98,2986 3287.98,3014 3287.98,3601.31 3244.8,3644.49 P2.P$20@3173.82,3644.49
  Bottom w7: P2.P$20@3173.82,3644.49 3302.51,3644.49 3401.97,3545.03 3416.58,3545.03 3440.03,3521.58 3440.03,3364.97 P3.10@3500,3305
PH6: P2.P$12 U2.18 | length 1649.7
  Top w7: 3213,3596.77 3257.98,3551.79 3257.98,3509
  Top w8: U2.18@2518.36,2834.96 2518.36,2964.9 2643.3,3089.85 3162.24,3089.85 3257.98,3185.59 3257.98,3509 ; P2.P$12@2973.82,3644.49 3017.82,3600.49 3209.29,3600.49 3213,3596.77
PH7: P2.P$8 U2.27 | length 1351.2
  Top w8: U2.27@2301.83,2736.54 2357.94,2736.54 v1(2358.26,2736.22)
  Bottom w8: v1(2358.26,2736.22) 2406.2,2784.16 2406.2,3409.61 2685.09,3688.49 2829.82,3688.49 P2.P$8@2873.82,3644.49
PJ2: P1.P$13 U2.65 | length 1146.8
  Top w8: U2.65@2656.79,2205 2656.79,2256.2 2678.15,2277.56 v1(2678.15,2281.5)
  Bottom w8: v1(2678.15,2281.5) 2678.15,2302.52 2703.96,2328.33 2724.35,2328.33 2765.52,2369.5 2765.52,2936.25 2975.88,3146.61 2992.09,3146.61 P1.P$13@3023.82,3178.35
PJ3: P1.P$15 U2.66 | length 1175.8
  Top w8: U2.66@2676.79,2205 2676.79,2242.2 2713.36,2278.77 2713.36,2294.32 v1(2715.15,2296.11)
  Bottom w8: v1(2715.15,2296.11) 2715.15,2290.31 2780.52,2355.68 2780.52,2930.04 2982.09,3131.61 3027.09,3131.61 P1.P$15@3073.82,3178.35
PJ4: U2.67
PJ5: U2.68
PJ6: U2.69
PJ7: J1.16 TP67.TP U2.79 | length 3912.5
  Top w8: U2.79@2929.79,2344 U2.79@2931.79,2342 2964.34,2342 2974.15,2332.2 2974.15,2300.37 v6(3030.42,2244.09)
  Bottom w8: v6(3030.42,2244.09) 3030.42,2144.03 3128.45,2046 3615.42,2046 4257.06,1404.35 4719.23,1404.35 4822.83,1507.96 4822.83,2613.61 4695.67,2740.77 4548.2,2740.77 J1.16@4493.7,2795.28
PK0: U2.89
PK1: P1.P$17 U2.88 | length 971.5
  Top w8: v1(2830.71,2503.94) 2846.77,2520 U2.88@2931.79,2520
  Bottom w8: v1(2830.71,2503.94) 2800.91,2533.74 2800.91,2929.22 2988.3,3116.61 3062.09,3116.61 P1.P$17@3123.82,3178.35
PK2: U2.87
RD+: R2.2 U1.29 | length 57.1
  Top w8: R2.2@1634,2715 1648.84,2700.16 U1.29@1685,2700.16
RD-: R1.2 U1.30 | length 59.5
  Top w8: R1.2@1634,2660 1654.47,2680.47 U1.30@1685,2680.47
RESET: C1.1 C10.2 D3.A P1.P$14 P3.9 R46.1 S1.1 TP37.TP U2.30 X18.5 | length 4644.2
  Top w7: 2314.4,3133.6 2529.59,3133.6 2629.99,3234 2979.47,3234 P1.P$14@3023.82,3278.35 2995.32,3306.85 2814.57,3306.85 2695.32,3426.1 2695.32,3556.29 2746.03,3607 v2(2794,3607)
  Top w8: D3.A@2047.24,2795.28 2097.64,2744.88 2097.64,2744.09 2164.57,2744.09 R46.1@2203.93,2783.46 2228.35,2783.46 v1(2244.09,2767.72) 2259.84,2751.97 2259.84,2687.59 2269.96,2677.48 U2.30@2301.83,2677.48 ; C10.2@2221.46,2438.29 v1@2221.46,2457.68 ; v1(2302,3146) 2314.4,3133.6
  Bottom w7: v2(2794,3607) 2796,3609 3089.51,3609 3096.52,3601.99 3211.52,3601.99 3340.5,3473.01 3340.5,3364.5 P3.9@3400,3305
  Bottom w8: S1.1@1092.73,3277.98 1158.11,3212.6 2235.4,3212.6 v1(2302,3146) 2300.13,3144.13 2300.13,3009.56 X18.5@2342.13,2967.56 TP37.TP@2300,2900 2244.09,2844.09 v1(2244.09,2767.72) 2263.78,2748.03 2263.78,2720.32 2218.65,2675.2 2218.65,2482.12 2232.15,2468.62 v1(2231.41,2468.62)
RESET2: D4.A R47.1 TP44.TP U1.24 X17.5 | length 914.5
  Top w8: v2(1442,2936) 1442,2963.31 1440.75,2964.57 D4.A@1489.17,2964.57 ; U1.24@1711,2805 1711,2830.09 1701.77,2839.32 1614.42,2839.32 D4.A@1489.17,2964.57 ; X17.5@1769.53,2967.56 1726.53,3010.56 1726.53,3074.03 1690,3110.56 1649.06,3110.56 1626.53,3088.03 1626.53,3061.09 1590,3024.56 1549.17,3024.56 D4.A@1489.17,2964.57
  Bottom w8: TP44.TP@1400,3000 1442,2958 v2(1442,2936)
RX0: R34.2 TP30.TP U2.2 | length 1015.4
  Top w8: R34.2@2231.3,2332.88 2232.28,2333.86 2232.28,2366.14 2232.17,2366.26 v1(2231.41,2366.26) ; v1(2413.5,2647.77) 2417.35,2647.77 2475.24,2705.66 2750.31,2705.66 2833.79,2789.14 U2.2@2833.79,2834.96
  Bottom w7: TP30.TP@2200,2300 2200,2334.85 v1(2231.41,2366.26)
  Bottom w8: v1(2231.41,2366.26) 2272.41,2407.26 2272.41,2540.64 2376.01,2644.24 2409.97,2644.24 v1(2413.5,2647.77)
RX0-I: TP25.TP U1.9 U10.5 | length 557.5
  Top w7: 1799.92,2477.08 1800.92,2477.08 v2(1821,2457)
  Top w8: U1.9@1874.84,2641.46 U1.9@1874.49,2641.1 1874.49,2551.65 1799.92,2477.08 1775.17,2452.33 1775.17,2331.34 1809.46,2297.04 U10.5@1889.76,2297.04
  Bottom w7: TP25.TP@1800,2500 v2(1821,2457)
RX1: P2.P$3 U2.45 | length 1469.8
  Top w8: U2.45@2301.83,2382 2382.84,2382 2402.64,2362.2 v1(2409.44,2362.2)
  Bottom w8: v1(2409.44,2362.2) 2426.53,2362.2 2521.33,2457 2521.33,2625.78 2508.38,2638.73 2508.38,3038.59 2537,3067.21 2537,3280.32 2773.82,3517.14 P2.P$3@2773.82,3544.49
RX2: P2.P$16 P3.5 U2.12 | length 2146.9
  Top w8: U2.12@2636.79,2834.96 2636.79,2956.05 2680.58,2999.85 3118.55,2999.85 3162.4,2956 3272.41,2956 3317.98,3001.58 3317.98,3613.73 3243.23,3688.49 3117.82,3688.49 P2.P$16@3073.82,3644.49
  Bottom w7: P2.P$16@3073.82,3644.49 3102.32,3615.99 3289.01,3615.99 P3.5@3400,3505
RX3: P1.P$10 U2.63 | length 1304.2
  Top w8: v1(2610.68,2301.29) 2605.89,2296.5 2605.89,2258.92 2616.79,2248.02 U2.63@2616.79,2205
  Bottom w7: 2668,2777.39 2668,3182.63 2722.22,3236.85 2882.32,3236.85
  Bottom w8: v1(2610.68,2301.29) 2610.68,2335.63 2656.33,2381.28 2656.33,2729.69 2655.3,2730.72 2655.3,2764.69 2668,2777.39 ; 2882.32,3236.85 P1.P$10@2923.82,3278.35
RXL: LED10.C U1.10 | length 95.9
  Top w8: U1.10@1874.49,2660.79 1900.24,2660.79 1945.2,2615.82 LED10.C@1951.77,2615.82
SCK2: TP45.TP U1.15 X17.3 | length 447.5
  Top w8: X17.3@1669.53,2967.56 1687.44,2967.56 1764.68,2890.32 1828.13,2890.32 1902.49,2815.97 1902.49,2770.84 1891.65,2760 U1.15@1874.49,2760
  Bottom w8: X17.3@1669.53,2967.56 TP45.TP@1700,2900